# Altium PCB SiLPA.PcbDoc (part 9 of 10)
Units mm, origin at the board's own origin, x right, y up, seen from the top; angles counter-clockwise.
Board outline 222.36 x 100 mm, 4 copper layers (L1, P2, L3, L4), stack 1.598 mm thick; 583 components, 330 nets, 1692 pads, 1781 vias.
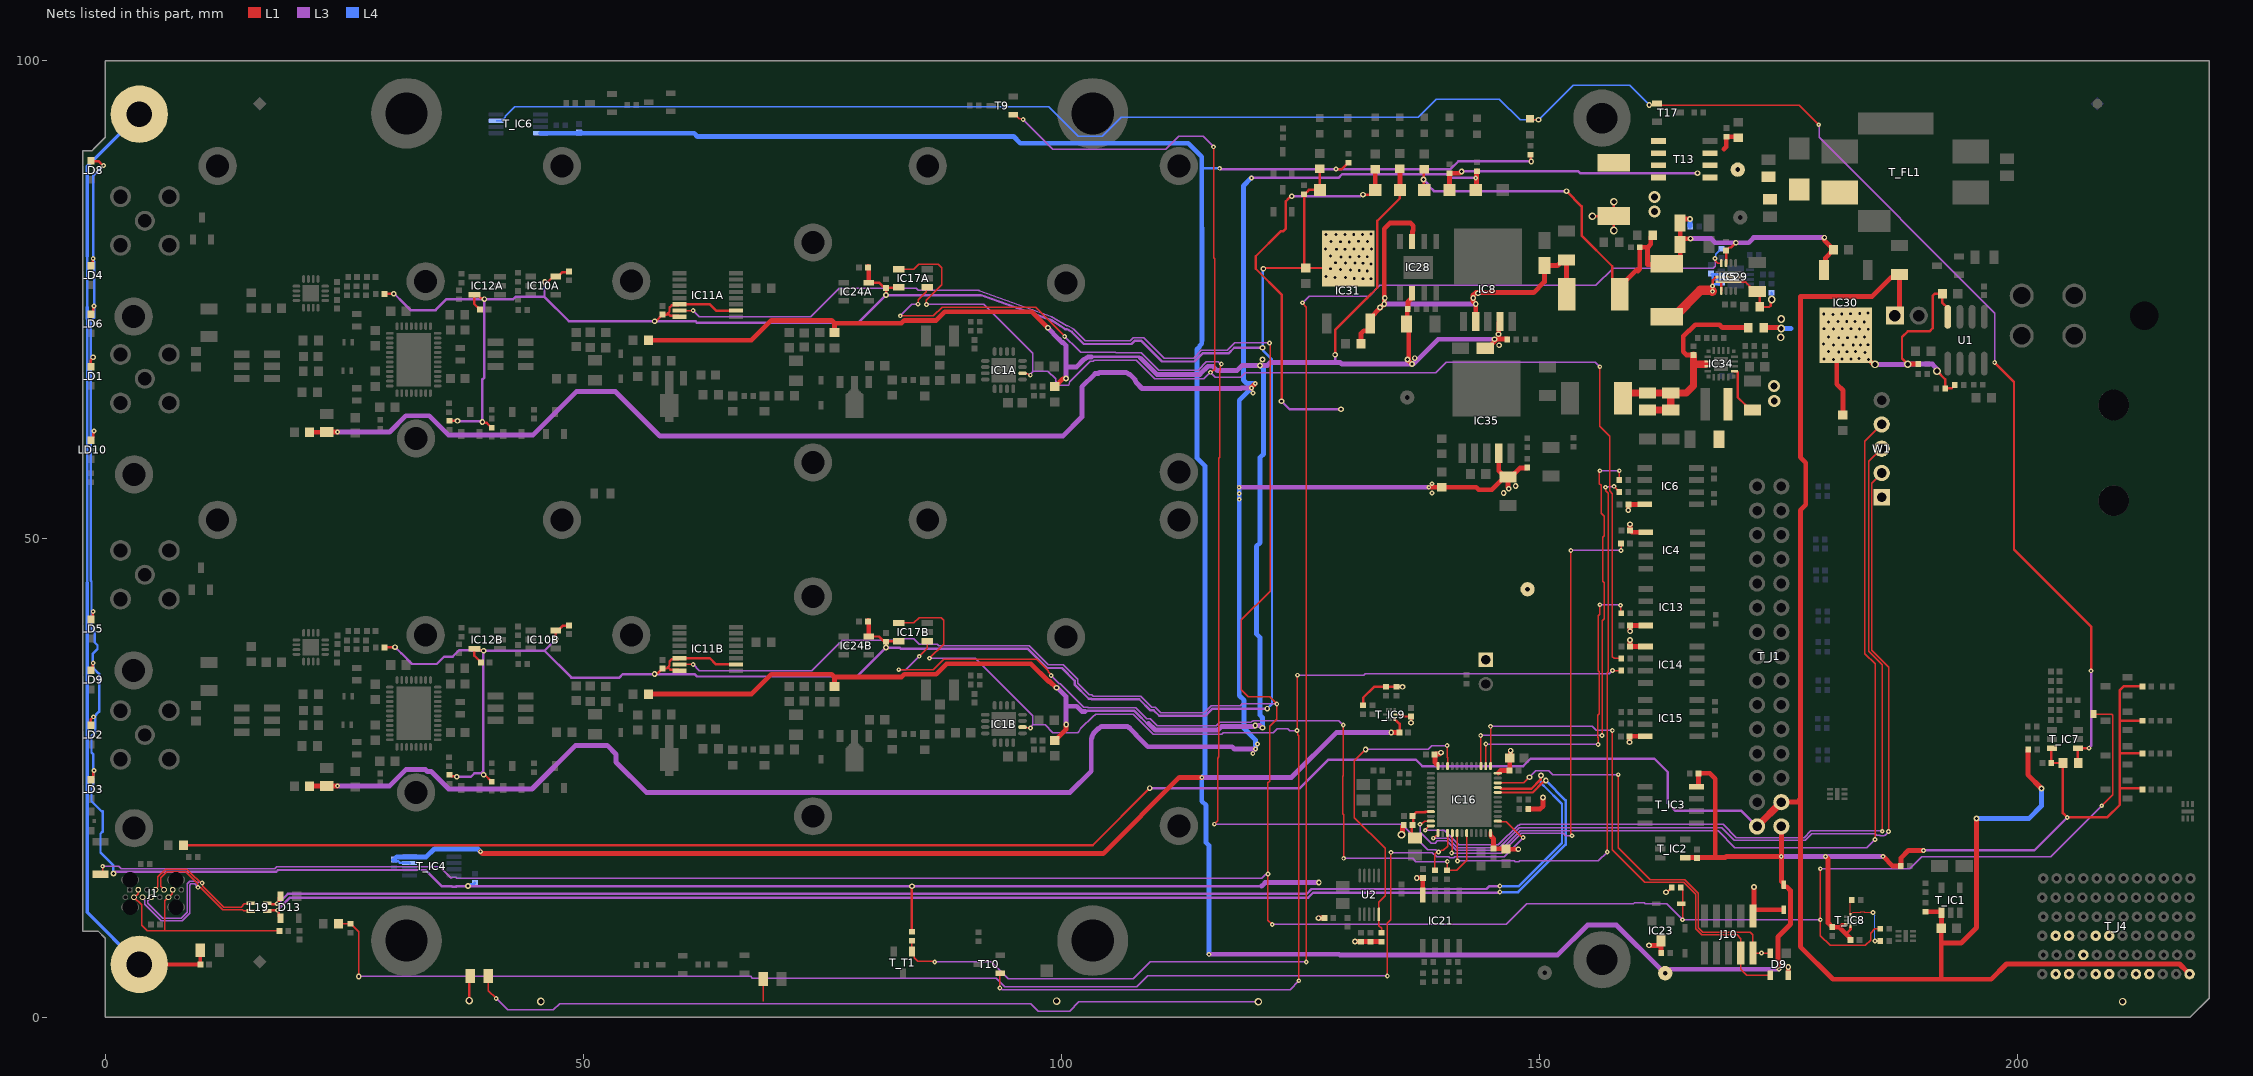
[diagram p9: the nets of this part, all layers, seen from the top]

## Via types
v1: diameter 0.5, hole 0.2, L1 to L4, tented both sides, 1301 vias
v2: diameter 0.6, hole 0.3, L1 to L4, tented both sides, 443 vias
v3: diameter 0.8, hole 0.5, L1 to L4, tented both sides, 25 vias
v4: diameter 0.5, hole 0.2, L1 to L4, 8 vias
v5: diameter 1.27, hole 0.711, L1 to L4, tented both sides, 4 vias

## Nets (pads, with @x,y where several pads share a name; then routed paths per layer and width w, separated by ;. In a path a pad name is that pad's centre, name@x,y a point inside that pad or via, vN(x,y) a via of type N, cw(c..) or ccw(c..) an arc to the next point about the centre after c; other vN are vias at no path point) (continued)
P3V3: C10.2 C32.2 C62.2 C63.2 C64.2 C69.2 C73.2 C75.2 C76.2 C78.2 C79.2 C113.2 C116.2 D9.4 D12.2 FB1.1 FB3.2 IC4.1 IC6.8 IC13.8 IC14.1 IC15.8 IC16.24 IC16.36 IC16.48 IC21.8 IC23.3 IC30.3 J10.1 JP1.1 LD1.2 LD2.2 LD3.2 LD4.2 LD5.2 LD6.2 LD8.2 LD9.2 LD10.2 R22.2 R53.1 R56.2 R57.2 R61.2 R66.1 R75.1 R92.2 R93.1 R105.2 R108.1 R109.2 R120.2 T_B2.1 T_C25.2 T_IC9.1 T_R67.2 T_R68.2 TP3.1 U1.8 W1.1 | length 347.1
  L1 w0.254: LD10.2@-1.512,60.338 -1.277,60.573 -1.277,61.016 -1.166,61.127 v4(-1.166,61.275) ; LD3.2@-1.5,24.8 -1.277,25.023 -1.277,25.516 -1.166,25.627 v4(-1.166,25.775) ; LD2.2@-1.5,30.5 -1.5,31.138 v4(-1.238,31.4) ; LD9.2@-1.5,36.25 -1.332,36.418 -1.332,36.954 v4(-1.266,37.02) ; LD5.2@-1.5,41.582 -1.332,41.75 -1.332,42.353 v4(-1.266,42.419) ; LD1.2@-1.5,68.021 -1.5,68.691 -1.266,68.925 v2(-1.266,69) ; LD6.2@-1.5,73.5 -1.277,73.723 -1.277,74.097 -1.166,74.208 v4(-1.166,74.356) ; LD4.2@-1.5,78.559 -1.332,78.727 -1.332,79.242 v4(-1.266,79.308) ; LD8.2@-1.5,89.55 -1.45,89.5 -0.723,89.5 -0.273,89.05 v4(-0.175,89.05) ; R22.2@84.35,8.93 v2(84.35,13.686) ; v2(123,64.4) 123,66.294 123.008,66.302 123.008,75.547 120.3,78.255 120.3,79.56 122.902,82.162 123.14,82.162 123.446,82.468 123.446,85.308 123.769,85.631 123.772,85.631 123.972,85.831 v2(124.066,85.831) ; v2(129.215,63.557) v2@129.242,63.529 ; v2(131.503,86) 132.3,86 TP3.1@132.8,86.5 ; R53.1@131.529,32.595 131.529,33.386 132.673,34.53 T_R67.2@135.024,34.53 v2(135.634,34.53) v2@135.634,34.552 ; 135.234,31.635 135.598,31.635 135.798,31.435 T_C25.2@136.544,31.435 v2(136.544,30.772) ; v2(163.195,13.058) 163.242,13.105 163.367,13.105 163.775,13.513 R93.1@163.775,13.533 ; v3(188.475,68.275) 187.875,68.875 187.875,71.1 188.475,71.7 190.75,71.7 191.075,72.025 191.075,75.425 191.275,75.625 C113.2@192.1,75.625 192.1,74.685 192.6,74.185 U1.8@192.6,73.75 ; v3(191.525,67.55) 192.395,66.68 R105.2@192.395,65.75 193.075,65.75 193.35,66.025 R57.2@193.375,66.025
  L1 w0.396: IC16.24@144.853,19.292 144.853,18.956 IC16.24@144.924,18.884
  L1 w0.5: v3(135.54,19.077) 135.644,19.181 135.644,19.944 FB1.1@135.775,20.075 ; v2(137.129,14.557) 137.137,14.565 C116.2@137.775,14.565 137.77,14.56 137.77,12.78 IC21.8@137.765,12.775
  L1 w0.508: v2(126.857,10.347) 126.871,10.361 127.466,10.361 FB3.2@127.48,10.375 ; v2(130.68,7.897) R120.2@132.319,7.897 R92.2@133.453,7.897 ; TP3.1@132.8,86.5 R108.1@132.8,88.652 ; IC16.48@139.249,26.413 139.032,26.63 139.032,27.445 C79.2@139.006,27.471 139.062,27.527 139.509,27.527 139.581,27.598 139.597,27.598 139.652,27.654 v2(139.677,27.654) ; IC16.24@144.924,18.884 145.168,18.641 C76.2@145.168,17.61 C75.2@146.425,17.61 ; IC16.36@145.651,25.523 145.895,25.767 C78.2@146.85,25.767 146.85,27.084 C73.2@146.855,27.084 146.933,27.163 146.933,27.846 v2(146.951,27.864) ; C75.2@146.478,17.558 v2(147.756,17.558) ; R75.1@148.77,21.767 150.044,21.767 150.341,22.065 v2(150.341,22.971) ; v2(159.254,53.005) C10.2@159.254,53.615 IC6.8@160.978,53.615 ; v2(159.391,28.744) C64.2@159.391,29.359 IC15.8@160.866,29.359 ; v2(159.429,51.537) C32.2@159.429,50.9 159.624,50.705 IC4.1@161.079,50.705 ; v2(159.437,39.435) C62.2@159.437,38.771 159.454,38.754 IC14.1@161.05,38.754 ; v2@159.49,40.383 v2(159.448,40.342) C63.2@159.448,40.952 IC13.8@161.078,40.952 ; v2(161.425,7.5) 161.431,7.494 IC23.3@162.682,7.494 ; R66.1@162.682,6.689 IC23.3@162.682,7.494 ; IC23.3@162.682,8.006 IC23.3@162.682,7.494 ; v2(172.387,13.593) 172.39,13.59 J10.1@172.39,11.225 ; J10.1@172.625,11.225 D12.2@175.5,11.225 ; D9.4@175.985,4.389 v2(175.985,5.25) ; C69.2@181.675,62.95 C69.2@181.7,62.95 181.7,65.525 181.05,66.175 181.05,70.35 IC30.3@182,71.3 IC30.3@184.388,68.912 ; IC30.3@184.388,68.737 184.875,68.25 v3(185.05,68.25) ; v3(188.475,68.275) R56.2@189.555,68.275
  L3 w0.254: v2(0.85,15.02) 1.022,15.192 1.633,15.192 17.872,15.192 18.061,15.38 33.472,15.38 35.153,13.7 36.208,13.7 36.262,13.646 36.679,13.646 36.733,13.7 120.918,13.7 ; v2(123,64.4) 123.843,63.557 v2(129.215,63.557) ; v2(124.066,85.831) 131.24,85.831 131.409,86 v2(131.503,86)
  L3 w0.508: 120.918,13.7 121.28,14.062 v2(126.893,14.062) ; v3(185.05,68.25) 188.45,68.25 v3(188.475,68.275) 191.05,68.275 191.525,67.8 v3(191.525,67.55)
  L4 w0.254: v4@-1.274,25.775 -1.274,27.51 -1.439,27.675 -1.439,29.384 -1.071,29.752 v4@-1.071,31.4 ; v4(-1.266,37.02) -1.329,37.084 -1.329,37.954 -0.812,38.471 -0.812,38.889 -1.121,39.198 -1.121,40.222 -1.439,40.54 v4@-1.439,42.419 ; v4(-1.266,42.419) v4@-1.439,42.419 ; v2(-1.266,69) v2@-1.5,69 ; v4@-1.266,79.215 -1.2,79.149 -1.2,79.02 -1.166,78.987 -1.166,73.134 -1.5,72.8 v2@-1.5,69 ; v4(-1.266,79.308) -1.266,87.959 v4(-0.175,89.05) ; v4@-1.254,37.019 -1.254,36.493 -0.649,35.888 -0.649,31.951 -0.966,31.634 ; v4(-1.166,25.775) -1.27,25.671 -1.27,25.357 -1.274,25.353 -1.274,24.245 -1.439,24.08 -1.439,22.575 -0.389,21.525 -0.275,21.525 -0.275,19.401 -0.5,19.176 -0.5,17.199 0.85,15.849 v2(0.85,15.02) ; v4(-1.166,61.275) -1.5,61.275 ; v2(37.916,13.7) 38.01,13.7 38.185,13.875 38.486,13.875 R61.2@38.649,14.038 ; -1.5,61.275 -1.5,45.624 -1.439,45.563 v4@-1.439,42.419 ; -1.5,61.275 v2@-1.5,69
  other v2: 180.721,68.762 184.378,68.762 179.7,68.825 181.6,68.825 182.525,68.825 183.375,68.85 184.003,69.512 181.253,69.562 182.125,69.575 180.2,69.6 183,69.6 180.721,70.287 181.703,70.287 182.778,70.287 183.528,70.287 184.3,70.3 179.65,70.375 181.253,71.037 182.178,71.037 180.175,71.1 183.05,71.125 183.95,71.125 184.35,71.925 180.725,71.95 183.425,71.95 179.7,71.975 181.625,71.975 182.525,71.975 180.2,72.7 183.925,72.7 182.1,72.725 182.975,72.725 181.175,72.75 180.643,73.485 181.575,73.5 179.693,73.51 182.5,73.55 183.45,73.575 184.325,73.625
P3V3_MP: D12.1 T_B3.1 T_C3.2 T_C4.2 T_C5.2 T_C8.2 T_C20.2 T_C22.2 T_C23.2 T_C24.2 T_IC2.4 T_IC3.8 T_IC4.7 T_IC4.8 T_IC6.8 T_IC7.6 T_IC8.1 T_IC8.8 T_IC9.8 T_J1.30 T_R1.2 T_R2.2 T_R6.2 T_R8.2 T_R31.2 T_R32.2 T_R33.2 T_R34.2 | length 488.6
  L1 w0.254: 85.469,17.1 85.5,17.069 ; v1(128.686,88.668) 129.307,88.668 129.804,89.165 129.804,89.185 129.967,89.348 T_R6.2@129.987,89.348 ; T_IC9.8@134.829,31.16 134.829,31.064 134.831,31.062 134.927,31.062 135.334,30.655 T_C24.2@135.334,29.76 ; T_R1.2@149.026,90.18 149.063,90.143 149.063,89.512 v2(149.1,89.475) ; T_IC7.6@203.553,28.122 203.478,28.047 T_C20.2@203.478,26.572 T_R8.2@204.703,26.572 204.703,21.325 v1(205.153,20.875) 209.316,20.875 210.65,22.209 210.65,23.944 ; T_R34.2@213.019,23.785 212.896,23.907 210.687,23.907 210.65,23.944 ; T_R33.2@213.019,27.58 210.658,27.58 210.65,27.572 ; T_R32.2@213.019,30.985 210.67,30.985 210.65,31.005 ; T_R31.2@213.019,34.588 211.051,34.588 210.65,34.187 210.65,31.005 ; 210.65,23.944 210.65,27.572 ; 210.65,27.572 210.65,31.005
  L1 w0.296: 181.666,9.701 T_IC8.8@182.008,9.701
  L1 w0.3: 181.303,9.401 181.603,9.701 181.666,9.701 ; 182.008,8.696 182.483,9.171 T_IC8.1@182.483,9.435
  L1 w0.508: v1(39.236,17.3) 39.436,17.1 85.469,17.1 104.35,17.1 112.311,25.061 v1(114.657,25.061) ; v2(134.46,29.75) 135.323,29.75 T_C24.2@135.334,29.76 ; T_IC2.4@165.204,16.675 168.35,16.675 ; T_IC3.8@166.4,24.092 166.536,24.092 166.582,24.138 T_C4.2@166.582,25.492 167.78,25.492 168.35,24.922 168.35,16.675 ; v1(175,5) 175,5.935 174.904,6.031 174.904,8.405 176.211,9.712 176.211,13.232 175.813,13.629 175.504,13.629 175.5,13.633 175.5,13.942 175.254,14.188 T_J1.30@175.254,19.938 ; v1(175.25,16.8) 169.495,16.8 169.37,16.675 168.35,16.675 ; v1(179.875,16.8) 180.141,16.534 180.141,9.844 T_C22.2@180.583,9.401 181.303,9.401 182.008,8.696 182.452,8.252 182.452,8.107 T_C23.2@182.508,8.051 ; v1(185.894,16.811) 186.916,15.79 T_R2.2@187.755,15.79 187.755,16.628 188.552,17.425 v1(190.134,17.425)
  L3 w0.254: v1(116.529,88.75) 116.627,88.652 v1@128.6,88.652 ; v1(128.686,88.668) 140.662,88.668 141.47,89.475 v2(149.1,89.475) ; v1(190.134,17.425) 201.703,17.425 v1(205.153,20.875)
  L3 w0.508: v1(114.657,25.061) 124.038,25.061 128.727,29.75 v2(134.46,29.75) ; v1(115.398,6.566) 129.034,6.566 129.1,6.5 151.868,6.5 154.997,9.629 158.003,9.629 162.632,5 v1(175,5) ; v1(175.25,16.8) v1(179.875,16.8) 185.882,16.8 v1(185.894,16.811)
  L4 w0.254: T_C8.2@30.193,16.493 30.376,16.31 30.514,16.31 30.524,16.3 30.653,16.3 30.833,16.119 31.806,16.119 T_IC4.7@31.821,16.104 ; 114.654,89 114.904,88.75 v1(116.529,88.75)
  L4 w0.508: T_C8.2@30.144,16.422 30.476,16.754 33.566,16.754 34.391,17.579 38.957,17.579 v1(39.236,17.3) ; T_IC6.8@45.51,92.426 T_C5.2@49.552,92.426 ; T_C5.2@49.552,92.439 49.869,92.439 49.881,92.426 61.574,92.426 61.92,92.08 94.975,92.08 95.674,91.381 113.236,91.381 114.654,89.963 114.654,89 114.654,82.59 ccw(c115.162,82.592) 114.66,82.515 114.66,70.735 114.654,70.729 114.654,70.629 114.654,70.415 114.485,70.246 114.466,70.217 114.441,70.156 114.431,70.092 114.143,69.804 114.143,58.474 115,57.617 115,25.404 v1(114.657,25.061) 114.657,22.575 115.1,22.133 115.1,18.251 115.398,17.953 v1(115.398,6.566)
P3V3A: C56A.2 C56B.2 C57A.1 C57B.1 C58A.2 C58B.2 C61A.2 C61B.2 C98.2 C245A.1 C245B.1 FB2A.1 FB2B.1 IC10A.5 IC10B.5 IC11A.2 IC11A.14 IC11A.16 IC11B.2 IC11B.14 IC11B.16 IC12A.5 IC12B.5 IC17A.5 IC17B.5 IC24A.5 IC24B.5 IC31.3 R20.1 R62A.2 R62B.2 R71A.2 R71B.2 R110.1 TP5.1 | length 348.8
  L1 w0.254: FB2B.1@29.19,38.63 29.215,38.655 30.275,38.655 v2(30.3,38.68) ; FB2A.1@29.19,75.63 29.193,75.633 v2(30.163,75.633) ; R62B.2@35.984,25.345 36.147,25.182 36.626,25.182 36.683,25.125 v2(36.75,25.125) ; R62A.2@35.984,62.345 v2(36.83,62.345) ; C57A.1@39.179,73.974 38.586,74.567 IC12A.5@38.586,75.519 38.911,75.519 39.262,75.168 v2@39.534,75.168 ; C57B.1@39.278,37.1 38.586,37.792 IC12B.5@38.586,38.519 38.759,38.346 38.785,38.372 39.499,38.372 v2(39.565,38.306) ; v2(39.43,62.235) 39.534,62.131 39.889,62.131 40.39,61.63 R71A.2@40.41,61.63 ; v2(39.565,25.345) 39.675,25.345 40.39,24.63 R71B.2@40.41,24.63 ; v2(45.965,76.875) 46.001,76.911 46.321,76.911 46.84,77.43 IC10A.5@47.09,77.43 47.34,77.43 47.809,77.899 48.449,77.899 C61A.2@48.5,77.95 ; v2(47.085,39.541) 47.085,40.425 IC10B.5@47.09,40.43 47.34,40.43 47.809,40.899 48.449,40.899 C61B.2@48.5,40.95 ; v2(57.441,35.865) 57.546,35.969 57.788,35.969 C56B.2@58.268,36.45 58.7,36.45 58.828,36.578 ; v2(57.441,72.759) 57.577,72.759 C56A.2@58.268,73.45 58.7,73.45 58.828,73.578 ; IC11B.16@60.05,36.225 59.952,36.323 59.083,36.323 58.828,36.578 ; IC11A.16@60.05,73.225 59.952,73.323 59.083,73.323 58.828,73.578 ; IC11B.2@65.95,36.875 63.875,36.875 63.225,37.525 IC11B.14@60.05,37.525 59.952,37.427 59.239,37.427 59,37.188 59,36.75 58.828,36.578 ; IC11A.2@65.95,73.875 63.875,73.875 63.225,74.525 IC11A.14@60.05,74.525 59.952,74.427 59.239,74.427 59,74.188 59,73.75 58.828,73.578 ; IC24B.5@79.833,39.795 80.909,39.795 81.424,39.279 C58B.2@81.669,39.279 ; IC24A.5@79.833,76.795 80.909,76.795 81.424,76.279 C58A.2@81.669,76.279 ; v2(81.64,38.636) C58B.2@81.64,39.25 C58B.2@81.669,39.279 ; v2(81.64,75.5) C58A.2@81.64,76.25 C58A.2@81.669,76.279 ; IC17B.5@83,39.25 82.971,39.279 C58B.2@81.669,39.279 ; IC17A.5@83,76.25 82.971,76.279 C58A.2@81.669,76.279 ; v2(121.092,78.246) 121.159,78.246 121.24,78.326 C98.2@125.54,78.326 ; R110.1@127,88.7 TP5.1@127,86.5 125.851,86.5 125.381,86.03 R20.1@125.361,86.03 125.361,78.505 C98.2@125.54,78.326 ; v2(128.65,78.875) 127.55,78.875 127.55,78.512 127.364,78.326 C98.2@125.54,78.326
  L1 w0.508: C245B.1@79.75,41.5 79.833,41.417 IC24B.5@79.833,39.795 ; C245A.1@79.75,78.5 79.833,78.417 IC24A.5@79.833,76.795
  L3 w0.254: v2(30.163,75.633) 30.21,75.633 31.237,74.605 31.923,73.92 34.54,73.92 35.692,75.072 v2(39.638,75.072) ; v2(30.3,38.68) 30.305,38.68 30.944,38.041 30.959,38.041 32.076,36.923 32.448,36.923 32.451,36.92 34.665,36.92 35.441,37.696 36.332,37.696 37.002,38.366 38.186,38.366 38.274,38.278 v2@39.537,38.278 ; v2(36.75,25.125) 38.223,25.125 38.602,25.504 39.304,25.504 39.5,25.7 ; v2(36.83,62.345) 36.873,62.301 39.364,62.301 v2(39.43,62.235) 39.43,66.68 39.638,66.888 v2(39.638,75.072) ; v2(39.565,25.345) 39.5,25.41 39.5,25.7 ; v2(45.965,76.875) 45.924,76.834 45.924,75.306 ; v2(47.085,39.541) 47.085,39.467 45.924,38.306 ; v2(81.64,75.5) 78.754,72.614 61.867,72.614 61.723,72.759 v2(57.441,72.759) 48.472,72.759 45.924,75.306 ; v2@81.641,75.501 91.549,75.501 98.97,72.85 98.994,72.835 100.401,71.947 100.539,71.947 100.998,71.692 101.029,71.675 101.055,71.65 102.319,70.385 107.29,70.385 107.617,70.713 108.337,70.713 110.5,68.55 113.895,68.55 114.747,69.402 117.458,69.402 118.053,69.997 v2(121,69.997) ; v2(121.5,32.25) 121.493,32.243 120.29,32.243 120.283,32.25 115.783,32.25 115.038,31.505 110.205,31.505 109.635,32.075 109.287,32.075 108.121,33.241 103.164,33.241 103.121,33.284 102.831,33.284 101.353,34.761 101.353,35.176 100.023,36.506 98.465,36.506 96.471,38.5 85.444,38.5 85.438,38.506 84.789,38.506 84.784,38.5 83.188,38.5 83.052,38.636 v2(81.64,38.636) 81.636,38.636 78.614,35.614 61.867,35.614 61.617,35.865 v2(57.441,35.865) 54.115,35.865 53.75,35.5 48.73,35.5 45.924,38.306 ; 39.5,25.7 39.5,38.241 v2@39.537,38.278 ; v2@39.537,38.278 v2(39.565,38.306) 45.924,38.306 ; v2(39.638,75.072) 42.665,75.072 42.899,75.306 45.924,75.306
  L4 w0.254: v2(121.092,78.246) 121.046,78.2 121.046,70.043 v2(121,69.997) 121.066,69.931 121.066,69.684 122,68.75 122,32.75 v2(121.5,32.25)
  other v2: 131.5,77.2 132.35,77.2 130.6,77.25 128.575,77.35 129.675,77.35 127.625,77.425 131.95,78.025 131.125,78.05 130.2,78.125 129.175,78.175 128.1,78.25 132.35,78.75 131.525,78.825 129.7,78.85 130.675,78.85 129.215,79.487 130.153,79.487 131.95,79.5 131.075,79.55 128.1,79.575 128.733,80.291 129.625,80.291 127.575,80.325 130.575,80.325 131.503,80.321 132.395,80.321 130.075,81.05 129.175,81.075 128.15,81.1 131.975,81.1 131.025,81.125 128.675,81.825 129.625,81.825 127.625,81.85 130.55,81.85 131.475,81.85 132.35,81.875
P3V3REF: C72.2 C94.2 FB1.2 IC16.9 | length 4.4
  L1 w0.254: C72.2@136.75,21.1 136.75,20.13 136.62,20 136.62,19.053 C94.2@136.948,18.725 ; C72.2@136.898,21.248 137.088,21.438 138,21.438 138.05,21.489 138.649,21.489 IC16.9@138.653,21.492
P5V0A: C30.2 C31.1 IC8.4 IC28.6 L1A.1 L1B.1 L2A.2 L2B.2 L5A.2 L5B.2 R80.2 R82.2 R216.1 TP16.1 | length 249.9
  L1 w0.254: v2(128.6,69.263) 128.6,71.834 131.949,75.183 131.949,75.211 133,76.262 133,83.25 135.369,85.619 TP16.1@135.369,86.5
  L1 w0.508: L2B.2@56.79,33.77 67.556,33.77 69.633,35.847 75.952,35.847 76.25,35.549 ; L2A.2@56.79,70.77 67.556,70.77 69.633,72.847 75.952,72.847 76.25,72.549 ; L1B.1@76.25,34.57 76.25,35.549 ; L1A.1@76.25,71.57 76.25,72.549 ; v2(98.558,72.075) 96.877,73.756 87.78,73.756 86.871,72.847 83.541,72.847 83.243,72.549 76.25,72.549 ; L5B.2@99.29,28.93 99.315,28.93 100.47,30.085 100.47,30.59 v2(100.488,30.607) ; L5A.2@99.29,65.93 99.315,65.93 100.138,66.753 100.432,66.753 v2(100.45,66.771) ; v2(99.454,34.441) 99.429,34.441 98.779,35.092 98.646,35.092 96.786,36.952 87.976,36.952 86.871,35.847 83.541,35.847 83.243,35.549 76.25,35.549 ; TP16.1@135.369,86.5 R216.1@135.369,88.7 ; v2(136.625,68.284) 136.625,68.309 136.606,68.309 v2(136.165,68.75) 136.29,68.876 136.29,72.878 136.133,73.035 136.133,73.989 136.205,74.061 136.205,74.777 136.639,75.211 IC28.6@136.639,75.686 ; v2(145.275,70.885) 145.829,70.885 145.865,70.921 ; v2@145.397,70.762 C31.1@144.575,69.94 ; IC8.4@145.836,72.74 145.71,72.614 145.71,71.4 145.71,71.075 145.865,70.921 ; R80.2@146.6,70.865 146.6,70.885 146.564,70.921 145.865,70.921 ; C31.1@144.575,69.94 C31.1@144.3,69.94 C31.1@144.575,69.94
  L3 w0.254: 102.427,31.937 102.512,32.022 107.551,32.022 107.556,32.017 107.61,32.017 107.949,31.677 108.898,30.729 109.078,30.729 ; 103.114,69.039 103.327,69.041 108.105,69.041 108.259,68.887 ; 128.6,68.457 v2(128.6,69.263)
  L3 w0.508: v2@98.625,72.075 v2(98.558,72.075) 99.685,70.902 100.054,70.532 100.152,70.532 100.45,70.235 100.45,67.99 ; v2@99.559,34.441 100.45,33.55 100.45,32.5 ; v2(100.45,66.771) 100.45,67.99 ; v2(100.488,30.607) 100.47,30.625 100.47,31.666 100.45,31.686 100.45,32.5 ; 102.427,31.937 102.14,31.937 101.577,32.5 100.45,32.5 ; 103.114,69.039 102.781,69.039 102.339,68.769 101.559,67.99 100.45,67.99 ; 108.259,68.887 109.942,67.204 114.452,67.204 115.305,68.056 115.811,68.056 116.266,67.601 118.329,67.601 118.872,68.144 v2(120.753,68.144) 121.509,68.144 121.823,68.457 128.6,68.457 129.137,68.457 129.311,68.284 v2(136.625,68.284) 136.765,68.284 139.366,70.885 v2(145.275,70.885) ; 109.078,30.729 109.79,30.016 116.34,30.016 116.704,30.381 120.106,30.381 120.225,30.5 v2(120.25,30.5) 120.268,30.482 120.743,30.482 120.975,30.25 v2(121,30.25)
  L4 w0.508: v2(120.753,68.144) 121.109,67.788 121.109,58.874 120.753,58.519 120.753,49.604 120.371,49.223 120.371,40.063 120.748,39.687 120.748,31.566 121,31.314 v2(121,30.25)
  other v2: 121,68.75 136.924,68.9 145.75,70.25 145.674,71.4
P5V5: C33.2 C34.2 C35.2 C68.2 C77.2 IC5.6 IC30.2 L9.2 L10.1 R28.2 R40.2 R106.1 TP1.1 | length 72
  L1 w0.254: TP1.1@137.909,86.5 137.85,86.559 137.85,88.593 R106.1@137.909,88.652 ; v2(152.781,86.366) 154.376,84.772 154.376,81.714 157.577,78.513 157.577,76.398 L10.1@158.375,75.6 ; IC5.6@169.479,78.84 C34.2@169.479,79.979 ; C34.2@169.479,80.14 169.815,80.476 170.001,80.476 v2(170.5,80.975)
  L1 w0.508: L10.1@158.375,75.6 158.375,76.375 160.125,78.125 ; 160.25,78 160.45,78.2 C77.2@160.45,80.5 161.25,80.5 ; 161.25,80.454 161.25,78.69 163.165,78.69 L9.2@163.25,78.775 164.014,78.775 164.685,79.446 C33.2@164.685,80.79 C35.2@164.685,83.047 164.685,83.141 165.006,83.462 v2(165.715,83.462) ; 161.273,80.477 161.604,80.808 161.604,81.554 R28.2@161.8,81.75 ; C33.2@164.893,81.393 165.743,81.393 v2(165.75,81.4) ; IC30.2@179.72,78.1 179.879,78.259 179.879,79.404 C68.2@180.7,80.225 ; v2(179.75,81.5) 179.75,81.225 180.7,80.275 C68.2@180.7,80.225 ; C68.2@180.7,80.25 C68.2@180.7,80.225
  L3 w0.254: v2(137.85,87.575) 138.422,87.003 138.422,86.872 138.928,86.366 v2(152.781,86.366)
  L3 w0.508: v2(165.75,81.4) 167.913,81.4 168.337,80.975 171.833,80.975 172.358,81.5 v2(179.75,81.5)
  L4 w0.508: R40.2@165.715,82.69 v2(165.715,83.462)
P5V5A: C27.1 C28.2 C97.2 IC8.2 IC28.3 IC31.2 L10.2 | length 46.8
  L1 w0.508: C97.2@131.287,70.41 131.287,71.465 131.584,71.763 132.021,71.763 132.267,72.009 132.267,73.093 133.331,74.158 v2(133.735,74.561) 133.735,82.435 134.347,83.047 136.467,83.047 136.765,82.749 136.765,82.241 136.685,82.162 136.685,81.132 IC28.3@136.639,81.086 ; IC8.2@143.296,72.74 143.296,74.586 143,74.882 143,75.452 143.298,75.75 149.35,75.75 150.473,76.873 C27.1@150.473,78.59 151.856,78.59 152.456,79.19 C28.2@152.781,79.19 152.781,75.644 L10.2@152.825,75.6
  L3 w0.508: v2(133.735,74.561) v2(143.296,74.561)
  other v2: 133.296,74.192 133.796,75.192 143.046,75.192 143.546,75.692
P12V0: C99.2 C114.2 J11.1 R51.2 R218.1 T13.1 T13.2 T13.3 T_B1.1 T_C1.2 T_C9.2 T_C10.2 T_D5.1 T_FL1.2 T_IC1.1 T_J1.28 T_J1.29 T_J4.A1 T_J4.D1 T_J4.E1 T_J4.G1 T_J4.H1 T_J4.J1 T_J4.K1 T_R3.1 T_R4.1 T_R29.1 TP18.1 | length 374.9
  L1 w0.254: T_R3.1@8.175,17.975 103.25,17.975 v2(109.214,23.939)
  L1 w0.508: TP18.1@140.55,86.5 R218.1@140.55,88.23 141.605,88.23 141.8,88.425 v2(141.825,88.425) ; 169.25,90.75 169.5,91 C99.2@169.5,92.05 170.45,92.05 R51.2@170.5,92 ; T_J1.28@175.647,22.478 176.903,22.478 177.25,22.825 ; J11.1@187.275,73.45 187.6,73.775 C114.2@187.6,77.675 187.279,77.354 186.753,77.354 184.76,75.361 177.25,75.361 177.25,58.536 177.816,57.971 177.816,53.569 177.25,53.003 177.25,22.825 ; T_R4.1@190.334,11.013 191.966,11.013 192.012,10.967 T_IC1.1@192.012,10.933 T_C1.2@192.012,9.284 ; T_C1.2@191.981,9.284 191.981,7.733 ; v2(195.67,20.775) 195.662,20.768 195.662,9.35 194.046,7.733 191.981,7.733 ; T_R29.1@201.066,27.987 201.03,27.951 201.03,25.34 v2(202.462,23.907) ; T_J4.A1@217.868,4.693 217.746,4.693 216.889,5.55 198.802,5.55 197.202,3.95 191.899,3.95 ; 177.25,22.825 177.25,7.361 180.661,3.95 191.899,3.95 ; 191.899,3.95 191.981,4.032 191.981,7.733
  L1 w0.762: T_J1.29@172.714,19.938 T_J1.28@175.254,22.478
  L3 w0.254: v2(109.214,23.939) 124.914,23.939 127.906,26.931 132.854,26.931 132.861,26.925 137.025,26.925 137.708,26.242 148.263,26.242 149.049,27.028 161.972,27.028 163.375,25.625 163.375,22.35 164.157,21.568 171.085,21.568 T_J1.29@172.714,19.938 ; v2(141.825,88.425) 154.042,88.425 154.217,88.25 v2(166.5,88.25)
  L4 w0.508: v2(195.67,20.775) 201.16,20.775 202.462,22.078 v2(202.462,23.907)
P12V0_SW: C37.2 C107.2 IC34.13 L8.1 L14.1 R96.1 T13.5 T13.6 T13.7 T13.8 | length 7.4
  L1 w0.254: IC34.13@170.35,67.55 170.571,67.55 170.704,67.417 170.704,64.796 171.477,64.023 171.477,63.948 171.675,63.75 C37.2@171.75,63.75
  L1 w0.508: R96.1@173.4,72.1 175.071,72.1 175.171,72 v3(175.25,72)
  L4 w0.508: v3(175.25,72) 176.25,72
  other v3: 175.199,71.073 175.25,73
  other v5: 174.513,64.428 174.5,66 162,84.25 162,85.75
P12V0A: C40A.2 C40B.2 C105.2 IC35.4 L11A.2 L11B.2 R97.2 R100.2 R107.1 TP2.1 | length 343.6
  L1 w0.508: C40B.2@21.37,24.16 L11B.2@23.16,24.16 23.18,24.18 v1(24.286,24.18) ; C40A.2@21.37,61.16 L11A.2@23.16,61.16 23.18,61.18 v1(24.286,61.18) ; v1(119.847,65.774) 119.847,65.847 v1(120.25,66.25) ; v1(138.393,55.4) R97.2@139.724,55.4 143.338,55.4 143.598,55.141 144.994,55.141 C105.2@146.34,56.487 ; TP2.1@143.304,86.5 143.376,86.572 143.376,87.674 v1(143.304,87.746) ; v1@143.376,87.746 143.376,88.432 143.412,88.468 R107.1@143.432,88.468 ; IC35.4@145.71,58.955 145.71,57.117 C105.2@146.34,56.487 ; v2(146.75,55.25) 146.75,55.275 146.665,55.36 C105.2@146.665,56.487 ; R100.2@148.684,57.467 148.648,57.431 147.934,57.431 146.99,56.487 C105.2@146.665,56.487 ; C105.2@146.34,56.487 C105.2@146.665,56.487
  L3 w0.254: v1(119.847,87.75) 128.946,87.75 129.325,88.129 140.238,88.129 140.621,87.746 v1(143.304,87.746)
  L3 w0.5: 103.957,30.212 104.14,30.395 104.377,30.395 104.382,30.4 106.618,30.4 106.623,30.395 106.884,30.395 106.993,30.286 107.047,30.286 107.278,30.056 107.48,29.854 107.786,29.547 107.786,29.493 109.012,28.268 117.828,28.268 118.074,28.021 v1(120.281,28.021)
  L3 w0.508: v1(24.286,24.18) 29.737,24.18 31.438,25.881 33.486,25.881 33.683,25.684 34.066,25.684 35.9,23.85 44.619,23.85 49.173,28.404 52.472,28.404 53.404,27.472 53.404,26.665 56.569,23.5 100.873,23.5 103.096,25.723 103.096,28.964 103.096,29.119 103.127,29.153 103.16,29.232 103.174,29.305 ccw(c102.676,29.405) 103.174,29.308 103.185,29.359 103.198,29.391 ccw(c102.729,29.587) 103.21,29.422 103.284,29.533 103.309,29.594 103.317,29.602 103.319,29.658 103.842,30.181 103.898,30.183 103.906,30.191 103.957,30.212 ; v1(24.286,61.18) 29.737,61.18 31.438,62.881 33.869,62.881 35.867,60.883 44.732,60.883 49.254,65.404 53.346,65.404 58,60.75 100.125,60.75 102.125,62.75 102.125,65.904 103.507,67.286 103.84,67.286 103.958,67.404 106.734,67.404 106.813,67.324 106.922,67.29 107.016,67.227 107.038,67.214 107.094,67.191 107.102,67.183 107.158,67.181 107.681,66.658 107.683,66.602 107.691,66.594 107.716,66.533 107.79,66.422 107.79,66.388 cw(c107.347,66.14) 107.824,66.313 108.407,65.73 118.742,65.73 118.785,65.774 v1(119.847,65.774) ; v1(118.567,55.4) v1(138.393,55.4)
  L4 w0.508: v1(119.847,65.774) 118.567,64.494 v1(118.567,55.4) 118.567,33.631 119.076,33.122 119.076,30.174 120.281,28.969 v1(120.281,28.021) ; v1(119.847,87.75) 119,86.903 119,66.621 119.371,66.25 v1(120.25,66.25)
  other v1: 119.992,27.553 120.492,28.553 118.572,54.144 118.572,54.741 138.74,54.797 138.74,55.772 120,65.25
  other v2: 146.223,54.795 147.473,55.545
P12V0F: C38.2 C95.2 IC5.1 IC5.8 IC29.2 IC29.3 L8.2 R17.2 R49.2 | length 15.3
  L1 w0.254: v3(155.5,83.75) 157.725,83.75 L8.2@157.75,83.775 ; v3(157.75,82.25) L8.2@157.75,83.775 ; v3(157.75,85.25) L8.2@157.75,83.775 ; IC5.8@168.979,75.94 168.979,76.729 IC5.1@169,76.75 ; IC5.1@169.729,76.89 171.485,76.89 171.956,76.419 171.956,76.338 172.044,76.25 C38.2@172.25,76.25 ; R17.2@172.978,74.3 173,74.322 C38.2@173,75.75 ; R17.2@173,74.25 173.997,74.25 174.146,74.399 174.146,74.926 v3(174.25,75.03)
  L4 w0.254: C95.2@167.975,77.675 168.425,77.675 168.367,77.617 168.956,77.617 IC29.3@168.979,77.64 ; C95.2@168.068,77.5 168.068,77.221 168.149,77.14 IC29.2@168.979,77.14 ; R49.2@174.229,75.72 174.239,75.709 174.239,75.041 v3(174.25,75.03)
P13V0_SW: C23.2 C25.2 C29.2 C104.2 IC34.6 IC34.7 L6.1 R96.2 R98.2 | length 26.9
  L1 w0.508: R98.2@166.078,69.23 166.058,69.25 165.325,69.25 165.006,69.569 165.006,71.211 165.561,71.766 165.644,71.766 166.275,72.397 168.791,72.397 169.088,72.1 R96.2@171.8,72.1
  L1 w0.762: L6.1@158.7,64.7 158.7,64.706 159.244,65.25 C25.2@161.25,65.25 C104.2@163.7,65.25 ; C23.2@161.25,63.474 C29.2@163.7,63.474 C104.2@163.7,65.25 ; R98.2@166.078,69.23 166.078,68.25 ; 167.345,68.3 167.295,68.25 166.078,68.25 ; C104.2@163.7,65.25 165.325,65.25 166.078,66.003 166.078,68.25
PGOOD: IC5.7 R22.1 R41.1 T_T1.1 | length 161.1
  L1 w0.152: T_T1.1@84.35,7.007 R22.1@84.35,7.99 ; T_T1.1@84.352,6.843 84.568,6.627 84.568,6.191 84.93,5.83 86.668,5.83 v1(86.734,5.763) ; v1(125.2,74.7) 125.2,74.625 125.575,74.25 v1(125.575,5.775) ; v1(168.332,79.326) 168.398,79.26 168.398,79.042 168.6,78.84 IC5.7@168.979,78.84
  L3 w0.152: v1(86.734,5.763) 92.65,5.763 94.417,3.996 107.508,3.996 109.288,5.775 v1(125.575,5.775) ; v1(125.2,74.7) 125.9,75.4 132.164,75.4 133.264,76.5 155.869,76.5 157.665,78.297 168.123,78.297 168.332,78.505 v1(168.332,79.326)
  L4 w0.152: v1(168.332,79.326) 168.398,79.393 168.398,79.792 168.75,80.144 R41.1@168.75,80.25
PSU_EN: T17.1 T_IC6.3 T_IC7.1 T_LD1.1 T_R8.1 | length 226.6
  L1 w0.152: T_LD1.1@148.975,93.925 149.075,93.825 v2(149.875,93.825) ; v2(161.45,95.383) 162.133,95.383 T17.1@162.275,95.525 ; T17.1@162.473,95.327 177.145,95.327 v1(179.168,93.305)
  L1 w0.257: v1(197.565,68.434) 199.586,66.413 199.586,48.903 207.648,40.841 v1(207.648,36.208) ; T_R8.1@206.303,26.572 206.253,26.622 T_IC7.1@206.253,28.122 v1(207.425,28.122)
  L3 w0.152: v1(179.168,93.305) 179.202,93.271 179.202,91.984 196.211,74.975 197.565,73.621 v1(197.565,68.434)
  L3 w0.257: v1(207.425,28.122) 207.425,28.171 207.648,28.394 v1(207.648,36.208)
  L4 w0.152: T_IC6.3@40.86,93.726 41.41,93.726 41.632,93.948 41.69,93.948 41.821,94.079 41.838,94.096 41.838,94.177 41.838,94.201 42.839,95.201 98.655,95.201 98.659,95.201 98.771,95.09 101.761,92.1 102.251,92.1 102.255,92.097 104.245,92.097 106.224,94.075 137.273,94.075 139.191,95.993 145.782,95.993 147.95,93.825 v2(149.875,93.825) 153.503,97.453 159.381,97.453 v2(161.45,95.383)
RDY/BSY: IC16.46 R92.1 U2.5 | length 32.2
  L1 w0.152: v2(131.788,27.988) 130.616,26.816 130.616,20.835 133.813,17.638 133.813,12.679 133.163,12.029 U2.5@133.163,10.75 ; U2.5@133.165,10.642 133.165,9.565 133.453,9.277 R92.1@133.453,8.837 ; v1(140.315,28.385) 140.315,27.177 140.366,27.126 140.366,26.206 IC16.46@140.353,26.192
  L3 w0.152: v2(131.788,27.988) 138.325,27.988 138.722,28.385 v1(140.315,28.385)
RF_CH_EN0: IC16.15 IC17A.1 R117.1 | length 119.5
  L1 w0.152: v1(83.129,73.325) 86.575,73.325 87.5,74.25 97.299,74.25 98.092,73.457 98.092,73.433 100.316,71.209 v1(100.316,71.163) ; v1(84.994,74.544) 84.994,75.003 85.836,75.844 85.836,76.256 IC17A.1@85.783,76.309 ; v1(115.966,20.175) 116.311,20.52 116.311,27.086 116.425,27.2 116.425,58.452 116.529,58.556 116.529,67.539 116.605,67.615 116.605,68.039 116.63,68.064 116.63,68.235 v1(116.696,68.302) ; R117.1@139.035,15.355 139.035,17.015 139.129,17.109 139.134,17.109 139.293,17.267 v1(139.414,17.267) ; v1@139.389,17.368 139.404,17.353 139.621,17.353 139.693,17.425 139.925,17.425 140.353,17.853 IC16.15@140.353,19.292
  L3 w0.152: v1(83.129,73.325) 84.348,74.544 v1(84.994,74.544) ; v1(100.316,71.163) 100.328,71.163 101.62,69.871 101.627,69.865 101.998,69.538 102.964,69.496 102.969,69.496 102.973,69.496 105.634,69.496 105.654,69.476 108.317,69.476 110.132,67.661 114.263,67.661 115.115,68.513 116.391,68.513 116.602,68.302 v1(116.696,68.302) ; v1(115.966,20.175) 135.577,20.175 138.27,17.482 139.101,17.482 139.315,17.267 v1(139.414,17.267)
RF_CH_EN1: IC16.19 IC17B.1 R119.1 | length 86.3
  L1 w0.152: v1(82.971,36.326) 86.576,36.326 87.659,37.409 97.391,37.409 98.6,36.2 98.6,36.092 98.908,35.785 v1(98.908,35.723) ; v1(85.114,37.722) 85.94,38.548 IC17B.1@85.94,39.309 ; v1(129.447,30.539) 129.447,25.226 129.394,25.174 129.394,21.266 129.506,21.154 129.506,16.616 v1(129.492,16.601) ; v1(140.328,16.268) 140.332,16.265 140.336,16.261 140.336,15.385 R119.1@140.305,15.355 141.323,15.355 142.353,16.384 142.353,18.345 142.367,18.359 142.367,19.278 IC16.19@142.353,19.292
  L3 w0.152: v1(82.971,36.326) 83.718,36.326 v1(85.114,37.722) ; v1(98.908,35.723) 98.908,35.702 99.756,34.854 99.87,34.854 102.329,32.394 102.754,32.394 102.796,32.352 107.753,32.352 108.919,31.186 109.267,31.186 109.98,30.473 116.15,30.473 116.515,30.838 119.815,30.838 119.897,30.92 119.962,30.92 120.045,31.003 128.982,31.003 v1(129.447,30.539) ; v1(129.492,16.601) 136.696,16.601 137.051,16.247 140.307,16.247 v1(140.328,16.268)
RFSW_DIS0: IC1A.2 IC17A.4 R42.1 T9.1 | length 168.3
  L1 w0.152: IC17A.4@83.19,78.209 84.516,78.209 85.044,78.737 87.11,78.737 87.467,78.38 87.467,76.553 85.866,74.953 v1(85.866,74.525) ; T9.1@94.941,94.35 95.141,94.35 95.574,93.917 95.914,93.917 v1(95.98,93.85) ; IC1A.2@95.912,67.321 95.959,67.273 96.483,67.273 96.631,67.125 v1(96.725,67.125) ; v1(115.558,67.417) 115.636,67.417 115.871,67.652 115.892,67.652 116,67.76 116,79.279 115.892,79.387 v1(115.892,91) ; v1(156.278,68) 156.278,61.766 157.314,60.731 157.314,55.022 157.598,54.738 157.598,37.67 157.767,37.501 R42.1@158.497,37.501
  L3 w0.152: v1(85.866,74.525) 91.866,74.525 97,69.391 97,67.546 ; v1(95.98,93.85) 99.067,90.763 110.897,90.763 112.221,92.087 114.806,92.087 v1(115.892,91) ; v1(96.725,67.125) 96.725,67.219 97,67.494 97,67.546 ; v1(156.278,68) 155.778,68.5 140.234,68.5 139.107,67.373 119.203,67.373 118.731,66.902 116.073,66.902 115.55,67.425 114.871,66.746 109.753,66.746 107.8,68.699 103.421,68.699 103.303,68.581 102.971,68.581 100.83,66.44 100.73,66.093 99.74,66.093 99.367,66.466 99.367,66.728 98.549,67.546 97,67.546
RFSW_DIS1: IC1B.2 IC17B.4 R43.1 T10.1 | length 154.3
  L1 w0.152: IC17B.4@83.19,41.209 84.548,41.209 85.092,41.753 87.406,41.753 87.659,41.5 87.659,39.013 v1(86.169,37.522) ; v1(93.535,3.052) 93.535,4.518 T10.1@93.592,4.576 ; IC1B.2@95.912,30.321 95.959,30.273 96.702,30.273 v1(96.75,30.225) ; v1(124.667,35.75) 124.633,35.717 124.633,29.994 v1(124.6,29.961) 124.667,29.895 124.667,29.54 124.8,29.406 v1(124.8,3.797) ; v1(157.598,36.231) R43.1@158.497,36.231
  L3 w0.152: v1(86.169,37.522) 90.965,37.522 97,31.487 97,30.546 ; v1(93.535,3.052) 93.629,3.052 93.802,2.878 123.881,2.878 v1(124.8,3.797) ; v1(96.75,30.225) 96.75,30.296 97,30.546 ; v1(124.6,29.961) 123.828,29.961 123.654,30.135 122.548,30.135 122.133,29.72 116.899,29.72 116.738,29.559 109.601,29.559 108.015,31.145 107.813,31.347 107.473,31.687 107.419,31.687 107.414,31.691 103.61,31.691 103.569,31.651 103.56,31.642 103.541,31.627 103.305,31.476 102.024,30.195 101.797,29.843 101.708,29.753 101.645,29.753 99.08,29.753 98.287,30.546 97,30.546 ; v1(124.667,35.75) 131.593,35.75 131.751,35.908 157.26,35.908 157.583,36.231 v1(157.598,36.231)
RSTn: D17.2 IC11A.15 IC11B.15 R93.2 SW1.1 T_D6.1 T_R15.1 | length 444.9
  L1 w0.152: SW1.1@-0.5,14.92 -0.275,15.145 v1(-0.275,15.77) ; IC11B.15@60.05,36.875 v1(61.469,36.875) ; IC11A.15@60.05,73.875 v1(61.469,73.875) ; v1(121.75,70.5) 121.8,70.45 121.8,44.546 118.777,41.523 118.777,34.255 119.524,33.508 121.746,33.508 v1(122.504,32.75) ; v1(122.025,9.686) 121.571,10.14 v1(121.571,14.977) 121.571,24.505 121.745,24.679 121.745,30.405 122.5,31.16 v1@122.5,32.746 ; R93.2@164.725,13.45 164.774,13.45 164.925,13.299 v1(164.925,10.175) ; v1(179.331,15.508) 179.335,15.504 179.335,8.53 180.349,7.516 180.367,7.516 180.395,7.488 184.046,7.488 184.589,8.031 184.589,8.78 185.045,9.236 T_R15.1@185.582,9.236 ; T_D6.1@207.889,31.689 209.782,31.689 209.892,31.579 209.892,23.229 v1(208.764,22.101)
  L3 w0.152: v1(-0.275,15.77) 1.398,15.77 1.646,15.522 17.736,15.522 17.924,15.711 34.95,15.711 36.153,14.508 36.187,14.508 36.283,14.603 36.658,14.603 36.754,14.508 120.925,14.508 121.315,14.898 121.398,14.898 121.477,14.977 v1(121.571,14.977) ; v1(61.469,36.875) 62.12,36.224 73.849,36.224 77.044,39.419 83.139,39.419 83.303,39.582 84.519,39.582 85.121,38.98 86.984,38.98 87.134,38.83 96.608,38.83 98.602,36.836 100.159,36.836 101.683,35.312 101.683,34.898 102.866,33.715 103.157,33.715 103.301,33.571 108.258,33.571 109.424,32.405 109.772,32.405 110.342,31.835 114.901,31.835 115.646,32.58 118.697,32.58 118.87,32.753 121.812,32.753 121.819,32.746 122.5,32.746 v1(122.504,32.75) ; v1(61.469,73.875) 62.12,73.224 73.752,73.224 76.744,76.216 84.784,76.216 85.02,75.98 91.359,75.98 91.395,75.944 98.944,73.239 99.044,73.194 99.145,73.133 100.537,72.277 100.624,72.277 101.211,71.951 101.23,71.941 101.245,71.926 102.456,70.715 107.153,70.715 107.481,71.043 108.579,71.043 110.705,68.917 113.795,68.917 114.61,69.732 117.321,69.732 118.089,70.5 v1(121.75,70.5) ; v1(122.025,9.686) 129.398,9.686 129.428,9.716 130.371,9.716 130.401,9.686 146.487,9.686 148.645,11.844 159.782,11.844 159.912,11.974 160.918,11.974 161.048,11.844 163.264,11.844 164.925,10.184 v1(179.335,10.184) ; v1(179.331,15.508) 179.341,15.498 188.683,15.498 189.935,16.75 203.413,16.75 v1(208.764,22.101)
SB_0: T_J4.I2
SB_1: T_J4.G3
SB_2: T_J4.H3
SB_3: T_J4.J3
SB_4: T_J4.K3
SERVMOD_3V3: T_IC8.5 T_R17.1 T_R19.2 | length 7.7
  L1 w0.127: T_IC8.5@182.483,10.681 T_IC8.5@182.483,10.781 ; T_R19.2@182.628,12.24 182.483,12.095 182.483,10.843 T_IC8.5@182.483,10.781 ; v1(184.837,10.934) 184.783,10.989 183.928,10.989 183.922,10.995 183.557,10.995 183.551,10.989 182.79,10.989 182.644,10.843 182.544,10.843 T_IC8.5@182.483,10.781 ; v1(185.042,7.95) 185.064,7.95 185.083,7.969 T_R17.1@185.582,7.969
  L4 w0.127: v1(184.837,10.934) 184.837,10.878 185.042,10.673 v1(185.042,7.95)
SPI1_MISO: IC16.16 R16.1 | length 51.6
  L1 w0.152: v1(140.787,17.15) 140.853,17.215 IC16.16@140.853,19.292 ; v1(153.247,48.8) 153.247,19.229 153.288,19.188 153.288,19.032 v1(153.354,18.966) ; R16.1@158.489,49.54 158.504,49.526 v1(158.504,48.8)
  L3 w0.152: v1(140.787,17.15) 145.989,17.15 148.071,19.232 152.432,19.232 152.698,18.966 v1(153.354,18.966) ; v1(153.247,48.8) v1(158.504,48.8)
SPI1_MOSI: IC16.17 R35.1 | length 59.2
  L1 w0.152: IC16.17@141.353,19.292 141.349,19.289 141.349,18.314 141.353,18.311 141.353,16.369 v1(141.393,16.328) ; v1(156.861,55.4) 156.884,55.376 156.884,55.056 157.145,54.796 157.145,49.813 157.145,36.087 157.051,35.993 v1(157.051,17.259) ; v1(157.767,55.498) 158.101,55.165 158.101,55.099 R35.1@158.314,54.885
  L3 w0.152: v1(141.393,16.328) 147.339,16.328 147.42,16.247 147.796,16.247 147.877,16.328 156.119,16.328 v1(157.051,17.259) ; v1(156.861,55.4) 156.91,55.449 157.718,55.449 v1(157.767,55.498)
SPI1_NSS: IC16.38 R39.1 | length 32
  L1 w0.152: IC16.38@144.353,26.192 144.353,28.539 v1(144.358,28.544) ; v1(156.104,28.509) 156.104,29.205 156.047,29.263 156.047,31.538 156.221,31.712 156.221,36.102 156.104,36.218 156.104,41.954 156.278,42.128 v1(156.278,43.121) ; v1(158.448,43.066) 158.448,42.287 R39.1@158.508,42.227 R39.1@158.504,42.222
  L3 w0.152: v1(144.358,28.544) 144.393,28.509 v1(156.104,28.509) ; v1(156.278,43.121) 156.305,43.093 158.421,43.093 v1(158.448,43.066)
SPI1_SCK: IC16.39 R37.1 | length 47.1
  L1 w0.152: v1(143.815,29.45) 143.828,29.438 143.828,26.217 IC16.39@143.853,26.192 ; v1(156.278,57.133) 156.225,57.079 156.225,55.794 156.408,55.611 156.408,52.676 156.731,52.352 156.731,50.312 156.6,50.181 156.6,49.435 156.6,45.561 156.731,45.43 156.731,41.65 156.522,41.44 156.522,29.472 v1(156.5,29.45) ; R37.1@158.314,56.155 v1(158.314,57.133)
  L3 w0.152: v1(143.815,29.45) v1(156.5,29.45) ; v1(156.278,57.133) v1(158.314,57.133)
STRIP1: T_B7.1 T_B8.1 T_C12.1 T_R26.1 T_R28.2 | length 103.6
  L1 w0.254: v3(38.05,1.725) 38.05,4.18 T_R28.2@38.15,4.28
  L1 w0.4: T_B7.1@3.556,5.512 9.691,5.512 9.925,5.746 T_R26.1@9.925,6.825
  L4 w0.278: -1.893,45.375 -1.893,73.049 ; -1.893,74.231 -1.893,79.558
  L4 w0.378: -1.893,73.049 -1.893,74.231
  L4 w0.4: -1.893,45.375 -1.893,10.961 T_B7.1@3.556,5.512 ; -1.893,79.558 -1.893,88.963 T_B8.1@3.556,94.412
STRIP2: T_R27.1 | length 2.4
  L1 w0.152: T_R27.1@68.81,4 68.81,1.66 68.82,1.65
  other v3: 45.55,1.625 99.475,1.675
STRIP3: T_R28.1 | length 83.9
  L1 w0.152: T_R28.1@40.1,4.33 T_R28.1@40.05,4.28 40.05,2.775 v1(40.875,1.95)
  L3 w0.152: v1(40.875,1.95) 42.075,0.75 43.775,0.75 ; 43.775,0.762 46.863,0.762 47.498,1.397 96.774,1.397 97.536,0.635 100.838,0.635 101.803,1.6 v3(120.575,1.6)
  other v3: 210.939,1.62
Sw_7V5: IC5.2 IC29.1 L9.1 | length 10.5
  L1 w0.254: v1@168,75.935 168.045,75.98 168.045,76.409 v1@168,76.453 ; v1(168.045,76.453) 168.092,76.501 168.092,77.05 168.336,77.294 168.395,77.294 168.491,77.39 IC5.2@169.729,77.39
  L1 w1: L9.1@163.25,73.225 164.025,73.225 166.8,76 167.935,76 v1(168.045,75.89)
  L4 w0.254: v1@168.045,75.956 v1(168.045,75.89) 168.045,76.347 168.337,76.64 IC29.1@168.979,76.64
SWCLK: D9.3 IC16.37 J10.4 | length 55.5
  L1 w0.152: IC16.37@144.853,26.192 v1(144.853,30.405) ; v1(157.583,29.979) 157.583,17.482 160.965,14.1 161.412,14.1 161.432,14.08 165.055,14.08 166.3,12.835 166.3,9.237 166.941,8.596 170.629,8.596 171.01,8.215 J10.4@171.01,6.689 171.01,5 171.621,4.389 D9.3@174.085,4.389
  L3 w0.152: v1(144.853,30.405) 155.461,30.405 155.886,29.979 v1(157.583,29.979)
SWDIO: D9.2 IC16.34 J10.2 | length 44.7
  L1 w0.152: IC16.34@145.553,24.492 148.332,24.492 v2@148.915,25.075 ; v1(158.207,25.35) 158.207,17.7 161.548,14.36 165.17,14.36 166.579,12.951 166.579,9.353 167.057,8.875 172.001,8.875 172.28,8.596 J10.2@172.28,6.689 v1(173.182,6.689) D9.2@174.085,6.689
  L3 w0.152: v2(148.915,25.074) 149.601,25.76 150.932,25.76 151.343,25.35 v1(158.207,25.35)
USART2_DE: IC16.11 W1.4 | length 97.2
  L1 w0.152: v1(137.462,20.161) 137.547,20.247 137.734,20.247 137.979,20.492 IC16.11@138.653,20.492 ; v1(185.05,18.575) 185.05,36.95 183.991,38.009 183.991,60.216 W1.4@185.75,61.975
  L3 w0.152: v1(137.462,20.161) 137.522,20.101 137.522,19.332 138.656,18.199 139.055,18.199 139.288,18.431 140.29,18.431 141.271,17.45 145.894,17.45 147.955,19.511 152.548,19.511 152.571,19.488 168.639,19.488 170.402,17.725 184.2,17.725 v1(185.05,18.575)
USART2_RX: IC16.13 W1.2 | length 89.6
  L1 w0.152: v1(138.855,18.711) 138.936,18.711 139.169,18.943 139.279,18.943 139.353,19.017 IC16.13@139.353,19.292 ; W1.2@185.75,56.895 184.697,55.842 184.697,38.348 186.475,36.569 v1(186.475,19.4)
  L3 w0.152: v1(138.855,18.711) 140.406,18.711 141.387,17.729 145.779,17.729 147.84,19.79 147.981,19.79 148.002,19.811 169.014,19.811 170.329,18.496 177.758,18.496 178.459,19.196 185.07,19.196 185.244,19.022 185.571,19.022 185.617,18.976 185.992,18.976 186.038,19.022 186.097,19.022 v1(186.475,19.4)
USART2_TX: IC16.12 W1.3 | length 92.2
  L1 w0.152: v1(138.025,19.541) 138.025,19.576 138.304,19.854 138.304,19.918 138.378,19.992 IC16.12@138.653,19.992 ; W1.3@185.75,59.435 184.417,58.102 184.417,38.232 185.805,36.845 v1(185.805,19.43)
  L3 w0.152: v1(138.025,19.541) 139.995,19.541 141.522,18.014 145.668,18.014 147.724,20.07 147.865,20.07 147.943,20.148 169.177,20.148 170.55,18.775 177.643,18.775 178.343,19.475 185.759,19.475 v1(185.805,19.43)
USB_D_R_N: J1.A7 J1.B7 L19.1 | length 23.6
  L1 w0.152: J1.A7@6.15,13.315 5.776,13.689 5.776,14.552 6.416,15.192 8.4,15.192 9.669,13.923 9.669,13.588 v1(9.687,13.57) 9.75,13.506 9.996,13.506 12.274,11.229 14.33,11.229 14.463,11.095 L19.1@15.216,11.095
  L3 w0.152: J1.B7@3.9,12.535 3.9,12.469 4.147,12.222 4.147,11.784 5.872,10.059 8.05,10.059 8.833,10.842 8.833,11.882 8.829,11.885 8.829,13.81 8.939,13.92 9.336,13.92 v1(9.687,13.57)
USB_D_R_P: J1.A6 J1.B6 L19.4 | length 24
  L1 w0.152: J1.A6@5.25,13.315 5.25,13.382 5.497,13.629 5.497,14.668 6.3,15.471 8.516,15.471 8.996,14.992 9.908,14.079 10.064,14.079 v1(10.13,14.013) 10.193,13.95 10.193,13.704 12.389,11.508 14.203,11.508 14.538,11.843 15.164,11.843 L19.4@15.216,11.895
  L3 w0.152: J1.B6@4.8,12.535 4.426,12.162 4.426,11.9 5.988,10.338 7.934,10.338 8.553,10.957 8.553,11.766 8.55,11.769 8.55,13.926 8.824,14.199 9.452,14.199 9.534,14.118 9.867,14.118 9.905,14.079 10.064,14.079 v1(10.13,14.013)
USB_N: D13.3 IC16.32 L19.2 | length 152.8
  L1 w0.254: L19.2@16.916,11.095 16.989,11.168 17.375,11.168 17.388,11.182 v1(18,11.182) 18,11.115 18.143,10.973 18.143,10.518 D13.3@18.316,10.345 ; IC16.32@145.553,23.492 145.557,23.488 149.264,23.488 150.347,24.572 150.365,24.572 150.537,24.743 v2(150.631,24.743)
  L3 w0.254: v1(18,11.182) 19.318,12.5 125.789,12.5 126.304,13.015 145.587,13.015 145.598,13.026 145.772,13.026 v1(145.819,13.073)
  L4 w0.254: v1(145.819,13.073) 147.732,13.073 152.698,18.039 152.698,22.657 150.631,24.725 v2(150.631,24.743)
USB_P: D13.2 IC16.33 L19.3 | length 152.4
  L1 w0.254: L19.3@16.916,11.895 16.989,11.822 17.375,11.822 17.388,11.809 17.914,11.809 v1(17.957,11.852) ; v1@18,11.875 18.143,12.018 18.143,12.472 D13.2@18.316,12.645 ; IC16.33@145.553,23.992 145.828,23.992 145.924,23.896 146.083,23.896 146.11,23.869 149.106,23.869 150.077,24.84 150.077,25.217 v2(150.117,25.257)
  L3 w0.254: v1(17.957,11.852) 18.024,11.852 18.147,11.975 18.166,11.975 19.072,12.881 125.631,12.881 126.146,13.396 144.421,13.396 144.725,13.7 v1(145.819,13.7)
  L4 w0.254: v1(145.819,13.7) 147.82,13.7 152.317,18.197 152.317,22.281 150.409,24.189 150.401,24.189 150.077,24.514 150.077,25.217 v2(150.117,25.257)
USB_VBUS: FB4.2 J1.A4 J1.A9 J1.B4 J1.B9 | length 23.4
  L1 w0.152: J1.B9@3,12.535 3.812,11.723 3.812,9.617 4.412,9.017 6.234,9.017 ; J1.B9@3.05,12.535 3.424,12.909 J1.A4@3.424,13.239 ; J1.B4@6.6,12.535 6.6,12.522 6.234,12.156 6.234,9.017 ; J1.B4@6.65,12.535 7.024,12.909 7.024,13.239 J1.A9@7.1,13.315 ; FB4.2@18.209,9.017 6.234,9.017
VBUS_DET: IC16.26 R69.1 R70.1 | length 147
  L1 w0.152: R69.1@24.384,9.779 R70.1@25.654,9.779 ; R70.1@25.654,9.741 25.674,9.741 26.5,8.915 v2(26.5,4.25) ; v1(134.058,4.31) 134.058,9.794 134.436,10.172 v1(134.436,17.226) ; IC16.26@145.553,20.492 145.626,20.418 146.492,20.418 148.01,18.901 148.042,18.901 148.165,18.778 v1(148.259,18.778)
  L3 w0.152: v2(26.5,4.25) 67.489,4.25 67.663,4.076 93.151,4.076 94.07,3.158 107.856,3.158 109.008,4.31 v1(134.058,4.31) ; v1(134.436,17.226) 134.46,17.203 138.767,17.203 139.205,16.764 140.461,16.764 140.579,16.646 140.995,16.646 141.13,16.781 146.261,16.781 v1(148.259,18.778)
pads on no net: FTG1.FTG2 FTG2.1 FTG3.1 FTG4.1 FTG5.1 FTG6.1 IC1A.4 IC1A.6 IC1A.7 IC1A.8 IC1A.13 IC1A.14 IC1A.15 IC1A.16 IC1B.4 IC1B.6 IC1B.7 IC1B.8 IC1B.13 IC1B.14 IC1B.15 IC1B.16 IC4.3 IC4.5 IC4.6 IC7A.1 IC7A.2 IC7A.3 IC7A.8 IC7A.10 IC7A.11 IC7A.12 IC7A.13 IC7A.14 IC7A.15 IC7A.16 IC7A.17 IC7A.18 IC7A.20 IC7A.21 IC7A.22 IC7A.23 IC7A.25 IC7A.26 IC7A.28 IC7A.30 IC7A.31 IC7A.32 IC7A.33 IC7A.35 IC7A.36 IC7A.37 IC7A.39 IC7A.40 IC7B.1 IC7B.2 IC7B.3 IC7B.8 IC7B.10 IC7B.11 IC7B.12 IC7B.13 IC7B.14 IC7B.15 IC7B.16 IC7B.17 IC7B.18 IC7B.20 IC7B.21 IC7B.22 IC7B.23 IC7B.25 IC7B.26 IC7B.28 IC7B.30 IC7B.31 IC7B.32 IC7B.33 IC7B.35 IC7B.36 IC7B.37 IC7B.39 IC7B.40 IC9A.2 IC9A.3 IC9A.6 IC9A.8 IC9A.12 IC9A.13 IC9A.16 IC9B.2 IC9B.3 IC9B.6 IC9B.8 IC9B.12 IC9B.13 IC9B.16 IC11A.6 IC11A.7 IC11A.9 IC11B.6 IC11B.7 IC11B.9 IC13.3 IC13.4 IC13.6 IC16.1 IC16.2 IC16.31 IC28.1 IC28.4 IC28.5 IC34.1 IC34.18 IC34.19 IC34.20 IC34.21 J10.6 J10.7 J10.8 J10.9 LD1.3 LD2.3 LD3.3 LD4.3 LD5.3 LD6.3 LD8.3 LD9.3 LD10.3 S1. S1.1 S2. S2.1 S3. S3.1 S4. S4.1 T_D1.4 T_D1.5 T_D1.6 T_D2.5 T_D3.5 T_IC1.4 T_IC2.5 T_IC3.7 T_J4.B1 T_J4.L2 T_J6.5 T_LD2.3 TR1A.1 TR1A.5 TR1B.1 TR1B.5 TR2A.1 TR2A.5 TR2B.1 TR2B.5 U2.8 U2.9

## Polygon pours and split planes (outlines as drawn)
no net on L1 "BAL_TOP" (solid, pour order 197): 15.846,95.228 229.75,95.228 229.75,0.181 15.846,0.181 15.846,5.155 12.524,5.155 9.475,8.204 9.475,75.705 11.963,78.193 11.963,88.955 15.846,88.955
P12V0A on L1 "NONET_L-01_P-001" (solid, remove dead copper, pour order 180): 138,56.25 144.5,56.25 145,56.75 145,60.25 145.5,60.75 147.75,60.75 148.25,60.25 148.25,55 147.5,54.25 138.25,54.25 137.75,54.75 137.75,56
STRIP1 on L1 "esd1" (solid, pour order 189): 0.25,7.075 7.375,7.075 7.375,2.55 40,2.55 40,1.05 0.25,1.05
P12V0 on L1 "NONET_L-01_P-001" (solid, remove dead copper, pour order 178): 178.75,82.5 180,83.75 183.925,83.75 183.925,88.111 174.069,88.111 170.93,91.25 166.75,91.25 166.25,90.75 166.25,87.5 167,86.75 168.25,86.75 170,85 174.25,85 176,83.25 176,14.75 176.75,14 176.75,6.5 180.25,3 218.25,3 219.25,4 219.25,5.25 219.75,5.75 219.75,6.75 219,7.5 201.5,7.5 200.5,6.5 181,6.5 178.75,8.75
NetT_C11_1 on L1 "NONET_L-01_P-001" (solid, remove dead copper, pour order 172): 192.5,95 203.5,95 208.5,90 208.5,79.5 208.5,70.419 207.594,69.512 204.238,69.512 203.5,70.25 203.5,87.5 202,89 197.5,89 197,88.5 192.5,88.5 192,89 192,94.5
NetT_C11_2 on L1 "NONET_L-01_P-001" (solid, remove dead copper, pour order 168): 192,88 197.5,88 197.5,88.5 201.5,88.5 203,87 203,70.209 202.264,69.472 199.308,69.472 198.5,70.281 198.5,81 197,82.5 193,82.5 191.5,84 191.5,87.5
P5V5 on L1 "NONET_L-01_P-001" (solid, remove dead copper, pour order 184): 166,84.75 166.25,84.5 166.25,77.25 165.75,76.75 162,76.75 160.75,75.5 160.75,74 159.5,72.75 157,72.75 156,73.75 156,77.75 156.5,78.25 158.75,78.25 160,79.5 160,81 160.25,81 160.5,81.25 161,81.25 161,82.5 161.25,82.75 162,82.75 164,84.75
P5V5A on L1 "NONET_L-01_P-001" (solid, remove dead copper, pour order 188): 142.334,76.131 142.628,76.425 148.199,76.425 148.75,76.976 148.75,79.673 149.238,80.161 151.416,80.161 151.918,80.663 154.125,80.663 154.51,80.278 154.51,73.635 153.85,72.975 150.97,72.975 149.51,74.436 144.419,74.436 144.061,74.078 144.061,70.881 143.968,70.788 142.334,70.788
P5V5A on L1 "NONET_L-01_P-001" (solid, remove dead copper, pour order 187): 133.296,83.023 133.296,75.538 130.55,72.791 130.55,69.363 130.835,69.078 133.578,69.078 134.347,69.847 134.347,77.437 137.274,80.364 137.274,83.24 136.765,83.75 134.023,83.75
P13V0_SW on L1 "NONET_L-01_P-001" (solid, remove dead copper, pour order 182): 157,62.5 157.5,62 164.75,62 166.75,64 166.75,71.25 167,71.5 170.25,71.5 170.75,71 172.25,71 172.75,71.5 172.75,72.75 172,73.5 166.25,73.5 163,70.25 158.75,70.25 157,68.5
NetC24_2 on L1 "NONET_L-01_P-001" (solid, remove dead copper, pour order 181): 138.5,59.75 140.99,59.75 141.009,60.777 150.24,60.75 150.25,62 155,62 155,66.25 154,67.25 150,67.25 148.75,66 148.75,63.5 147.75,62.5 138.5,62.5 138,62 138,60.25
P12V0_SW on L1 "NONET_L-01_P-001" (solid, remove dead copper, pour order 179): 167.25,59.25 167.25,61.25 168.75,62.75 168.75,66 169,66.25 171.25,66.25 172,67 175.25,67 175.5,66.75 175.5,63.75 175.25,63.5 170.5,58.75 167.75,58.75
GND on L1 "NONET_L-01_P-001" (solid, remove dead copper, pour order 175): 166.709,84.459 174.582,84.459 175.347,83.694 175.347,78.847 173.75,77.25 172,77.25 171.5,77.75 167,77.75 166.5,78.25 166.5,84.25
P12V0_SW on L1 "NONET_L-01_P-001" (solid, pour order 174): 163.75,92.5 163.75,84.75 162.5,83.5 161.5,83.5 160.75,84.25 160.75,85.75 160,86.5 154.75,86.5 153.75,87.5 153.75,91 155.25,92.5
STRIP2 on L1 "esd1" (solid, pour order 196): 82.933,1 100,1 100,2.269 45,2.269 45,1
STRIP3 on L1 "STRIP3_L01_P194" (solid, pour order 194): 217.533,1 217.55,1 218.79,2.24 120,2.24 120,1
no net on L4 "BAL_BOT" (solid, pour order 198): 2.4,98.525 218.02,98.525 218.02,3.023 6.706,3.023 6.629,3.099 4.318,5.41 4.318,8.179 -0.5,8.179 -0.155,89.368 2.4,91.923
P12V0A on L4 "NONET_L-01_P-001" (solid, remove dead copper, pour order 176): 118.25,67.5 120.25,67.5 120.75,67 120.75,65 119.25,63.5 119.25,30.5 120.75,29 120.75,27.75 120.5,27.5 118.75,27.5 118,28.25 118,31.5 116.75,32.75 116.75,66
P5V0A on L4 "NONET_L-01_P-001" (solid, remove dead copper, pour order 177): 119.5,30.25 120,29.75 121.25,29.75 121.75,30.25 121.75,68.75 121.25,69.25 120.25,69.25 120,69 120,67.75 120.25,67.75 120.75,67.25 120.75,64.75 119.75,63.75 119.75,49.75 119.75,32 119.5,31.75
P3V3 on L4 "NONET_L-01_P-001" (solid, remove dead copper, pour order 183): 126.25,65.774 124.8,64.324 124.8,9.45 126.75,7.5 159.925,7.5 162.675,4.75 176.654,4.75 177.154,5.25 177.154,13.231 168.25,22.135 168.25,54.787 167.293,55.745 167.293,58.215 167.628,58.55 178.9,58.55 184.725,52.725 189.435,52.725 193.65,56.94 193.65,75.388 190.961,78.077 179.391,78.077 178,76.686 178,64.756 176.419,63.175 149.425,63.175 148.1,61.85 140.832,61.85 136.907,65.774
STRIP1 on L4 "esd1" (solid, pour order 185): 0.25,7.075 7.375,7.075 7.375,2.55 40,2.55 40,1.05 0.25,1.05
P12V0F on L4 "NONET_L-01_P-001" (solid, pour order 173): 155.5,85.75 160,85.75 160.25,85.5 160.25,82.75 161,82 173,82 175.75,79.25 175.75,75 173.875,73.125 169.125,73.125 162.5,79.75 160,79.75 158,81.75 155.25,81.75 155,82 155,85.25
P12V0_SW on L4 "NONET_L-01_P-001" (solid, remove dead copper, pour order 147): 171.5,87 177.75,80.75 177.75,65.5 175.95,63.7 173.5,63.7 173.5,67 176,67 176,79.5 173,82.5 161,82.5 161,82.75 160.5,83.25 160.5,86.75 160.75,87
STRIP3 on L4 "STRIP3_L04_P193" (solid, pour order 193): 217.533,1 217.55,1 218.79,2.24 120,2.24 120,1
STRIP2 on L4 "esd1" (solid, pour order 191): 82.933,1 100,1 100,2.269 45,2.269 45,1